# Altium PCB PCB ASCII (3u v0.1-A1).PcbDoc (part 1 of 2)
Units mil, origin at the board's own origin, x right, y up, seen from the top; angles counter-clockwise.
Board outline 2630 x 740 mil, 4 copper layers (Top Layer, Mid-Layer 1, Mid-Layer 2, Bottom Layer), stack 61.6 mil thick; 74 components, 43 nets, 261 pads, 288 vias.
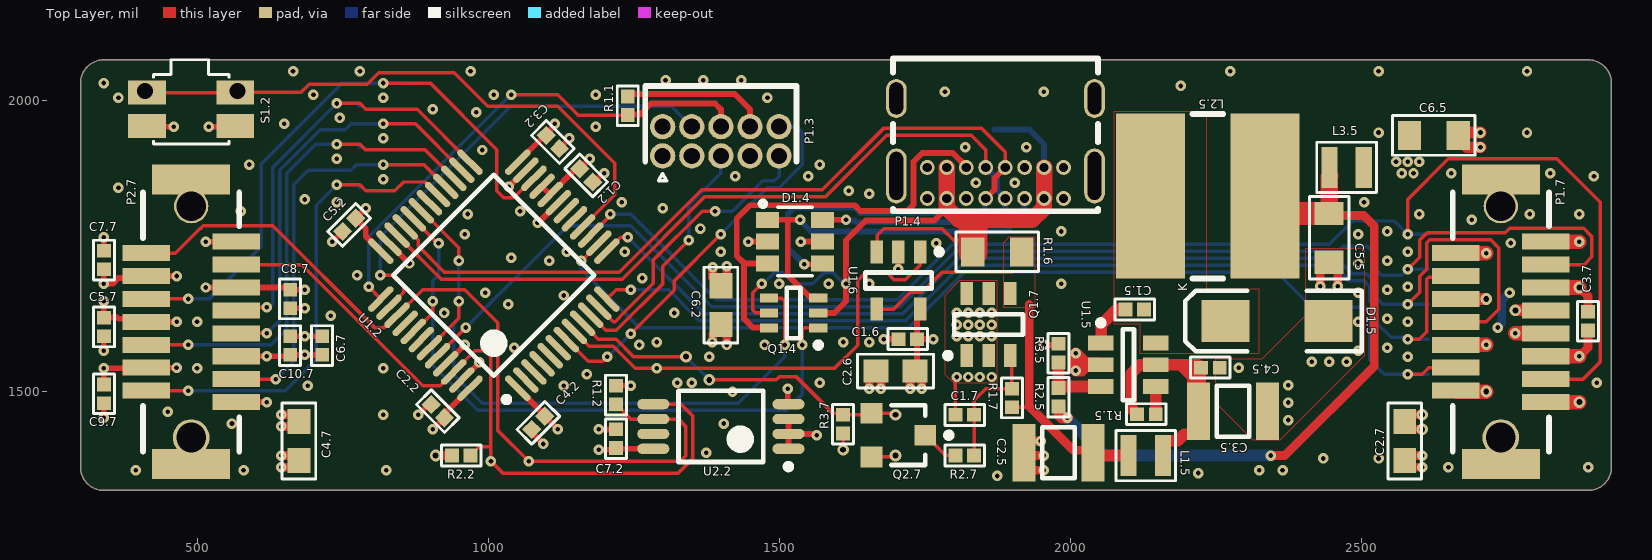
[diagram p0: Top Layer view]
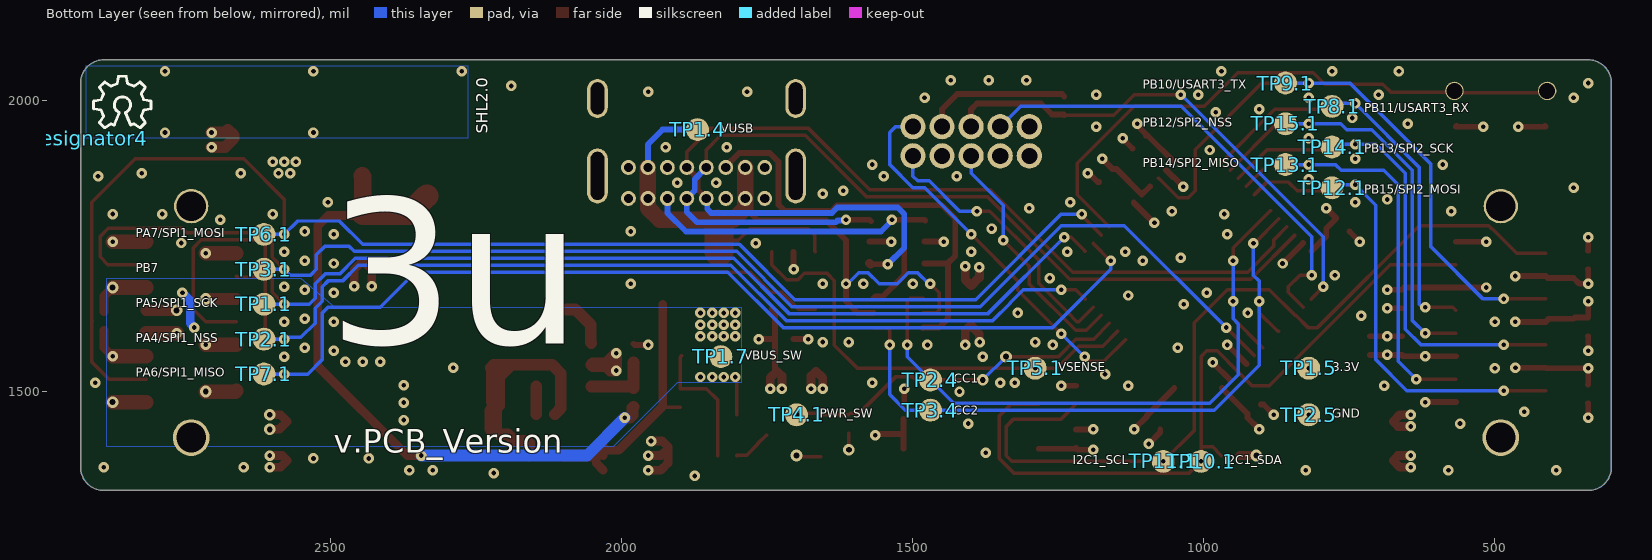
[diagram p1: Bottom Layer view, seen from below]

## Layer stack, top to bottom
Top Solder: solder mask 0.4, Solder Resist, Dk 3.5
Top Layer: signal copper 1.4
Dielectric 1: core 8, FR-4, Dk 4.2
Mid-Layer 1: signal copper 1.4
Dielectric2: prepreg 40, FR-4, Dk 4.2
Mid-Layer 2: signal copper 1.4
Dielectric3: core 8, FR-4, Dk 4.2
Bottom Layer: signal copper 1.4
Bottom Solder: solder mask 0.4, Solder Resist, Dk 3.5

## Board outline
340,1330 cw(c340,1370) 300,1370 300,2030 cw(c340,2030) 340,2070 2890,2070 cw(c2890,2030) 2930,2030 2930,1370 cw(c2890,1370) 2890,1330

## Design rules (kind name [scope] priority, off if disabled: settings)
AssemblyTestPointUsage [All] p0 off: scope1count=1 scope1_0_kind=Board scope1_0_value=Board scope2count=1 scope2_0_kind=Board scope2_0_value=Board commentlength=54 // Protel DXP Scope 1 Expression Was: NetPinCount > 1
AssemblyTestPointUsage [NetPinCount > 1] p1: allowmultiple=TRUE
AssemblyTestpoint [All] p0: scope1count=1 scope1_0_kind=Board scope1_0_value=Board scope2count=1 scope2_0_kind=Board scope2_0_value=Board commentlength=0
AssemblyTestpoint "AssemblyTestpoint Pad" [All] p0 off: scope1count=1 scope1_0_kind=Board scope1_0_value=Board scope2count=1 scope2_0_kind=Board scope2_0_value=Board commentlength=108 // Protel DXP Scope 1 Expression Was: (IsPad And (OnTopLayer Or OnBottomLayer)) Or (IsPad And OnMultiLayer)
AssemblyTestpoint "AssemblyTestpoint Via Both" [All] p0 off: scope1count=1 scope1_0_kind=Board scope1_0_value=Board scope2count=1 scope2_0_kind=Board scope2_0_value=Board commentlength=123 // Protel DXP Scope 1 Expression Was: (IsVia) and (SolderMaskTentingBottom = 'False') and (SolderMaskTentingTop = 'False')
AssemblyTestpoint "AssemblyTestpoint Via Bottom" [All] p0 off: scope1count=1 scope1_0_kind=Board scope1_0_value=Board scope2count=1 scope2_0_kind=Board scope2_0_value=Board commentlength=122 // Protel DXP Scope 1 Expression Was: (IsVia) and (SolderMaskTentingBottom = 'False') and (SolderMaskTentingTop = 'True')
AssemblyTestpoint "AssemblyTestpoint Via Top" [All] p0 off: scope1count=1 scope1_0_kind=Board scope1_0_value=Board scope2count=1 scope2_0_kind=Board scope2_0_value=Board commentlength=122 // Protel DXP Scope 1 Expression Was: (IsVia) and (SolderMaskTentingTop = 'False') and (SolderMaskTentingBottom = 'True')
AssemblyTestpoint "AssemblyTestpoint Via Top" [(IsVia) and (SolderMaskTentingTop = 'False') and (SolderMaskTentingBottom = 'True')] p1: testpointundercomponent=FALSE minsize=16 maxsize=500 preferedsize=60 minholesize=0 maxholesize=500 preferedholesize=32 testpointgrid=1 usegrid=FALSE gridtolerance=0.01 allowsidetop=TRUE
AssemblyTestpoint "AssemblyTestpoint Via Bottom" [(IsVia) and (SolderMaskTentingBottom = 'False') and (SolderMaskTentingTop = 'True')] p2: testpointundercomponent=FALSE minsize=16 maxsize=500 preferedsize=60 minholesize=0 maxholesize=500 preferedholesize=32 testpointgrid=1 usegrid=FALSE gridtolerance=0.01 allowsidebottom=TRUE
AssemblyTestpoint "AssemblyTestpoint Via Both" [(IsVia) and (SolderMaskTentingBottom = 'False') and (SolderMaskTentingTop = 'False')] p3: testpointundercomponent=FALSE minsize=16 maxsize=500 preferedsize=60 minholesize=0 maxholesize=500 preferedholesize=32 testpointgrid=1 usegrid=FALSE gridtolerance=0.01 allowsidetop=TRUE allowsidebottom=TRUE
AssemblyTestpoint "AssemblyTestpoint Pad" [(IsPad And (OnTopLayer Or OnBottomLayer)) Or (IsPad And OnMultiLayer)] p4: testpointundercomponent=TRUE minsize=20 maxsize=10000 preferedsize=60 minholesize=0 maxholesize=500 preferedholesize=32 testpointgrid=1 usegrid=FALSE gridtolerance=0.01 allowsidetop=TRUE allowsidebottom=TRUE
AssemblyTestpoint [All] p5: testpointundercomponent=FALSE minsize=0 maxsize=5000 preferedsize=60 minholesize=0 maxholesize=5000 preferedholesize=32 testpointgrid=1 usegrid=FALSE gridtolerance=0.01 allowsidetop=TRUE allowsidebottom=TRUE
BoardOutlineClearance PolygonPullback [All] p0: scope1count=1 scope1_0_kind=Board scope1_0_value=Board scope2count=1 scope2_0_kind=Board scope2_0_value=Board commentlength=0 gap=5
BoardOutlineClearance "Silk Exception" [All] p0 off: scope1count=1 scope1_0_kind=Board scope1_0_value=Board scope2count=1 scope2_0_kind=Board scope2_0_value=Board commentlength=90 gap=5 // Protel DXP Scope 1 Expression Was: OnLayer('Top Overlay') or OnLayer('Bottom Overlay')
BoardOutlineClearance "Silk Exception" [OnLayer('Top Overlay') or OnLayer('Bottom Overlay')] p1: gap=5 ignorepadtopadclearanceinfootprint=FALSE except(0: Arc-OutlineEdge Arc-CavityEdge Arc-CutoutEdge Arc-SplitBarrior Arc-SplitContinuation Track-OutlineEdge Track-CavityEdge Track-CutoutEdge Track-SplitBarrior Track-SplitContinuation; 10: Fill-OutlineEdge Fill-CavityEdge Fill-CutoutEdge Fill-SplitBarrior Fill-SplitContinuation Poly-OutlineEdge Poly-CavityEdge Poly-CutoutEdge Poly-SplitBarrior Poly-SplitContinuation)
BoardOutlineClearance PolygonPullback [All] p2: gap=5 ignorepadtopadclearanceinfootprint=FALSE except(0: Arc-OutlineEdge Arc-CavityEdge Arc-CutoutEdge Arc-SplitBarrior Arc-SplitContinuation; 10: Fill-OutlineEdge Fill-CavityEdge Fill-CutoutEdge Fill-SplitBarrior Fill-SplitContinuation Poly-OutlineEdge Poly-CavityEdge Poly-CutoutEdge Poly-SplitBarrior Poly-SplitContinuation)
Clearance Clearance_1 [All] p0: scope1count=1 scope1_0_kind=Board scope1_0_value=Board scope2count=1 scope2_0_kind=Board scope2_0_value=Board commentlength=0 gap=6
Clearance "Fiducial Clearance" [All] p0 off: scope1count=1 scope1_0_kind=Board scope1_0_value=Board scope2count=1 scope2_0_kind=Board scope2_0_value=Board commentlength=211 gap=0 // Protel DXP Scope 1 Expression Was: InComponent('M7.1') or InComponent('M1.1')  or InComponent('M2.1')   or InComponent('M3.1')    or InComponent('M4.1')     or InComponent('M5.1')      or InComponent('M6.1')
Clearance "Other Polygon Clearance" [All] p0 off: scope1count=1 scope1_0_kind=Board scope1_0_value=Board scope2count=1 scope2_0_kind=Board scope2_0_value=Board commentlength=48 gap=8 // Protel DXP Scope 1 Expression Was: InPolygon
Clearance "Outer Layer Polygon Clearance" [All] p0 off: scope1count=1 scope1_0_kind=Board scope1_0_value=Board scope2count=1 scope2_0_kind=Board scope2_0_value=Board commentlength=72 gap=6 // Protel DXP Scope 1 Expression Was: InPolygon and (ontop or OnBottom)
Clearance "Board Edge Clearance" [All] p0 off: scope1count=1 scope1_0_kind=Board scope1_0_value=Board scope2count=1 scope2_0_kind=Board scope2_0_value=Board commentlength=53 gap=15 // Protel DXP Scope 2 Expression Was: IsBoardOutline
Clearance "Board Edge Clearance" [IsElectrical vs IsBoardOutline] p1: gap=15 ignorepadtopadclearanceinfootprint=FALSE
Clearance "Outer Layer Polygon Clearance" [InPolygon and (ontop or OnBottom)] p2: gap=6 ignorepadtopadclearanceinfootprint=FALSE
Clearance "Other Polygon Clearance" [InPolygon] p3: gap=8 ignorepadtopadclearanceinfootprint=FALSE
Clearance Clearance_1 [All] p4: gap=6 ignorepadtopadclearanceinfootprint=FALSE
Clearance "Fiducial Clearance" [InComponent('M7.1') or InComponent('M1.1')  or InComponent('M2.1')   or InComponent('M3.1')    or InComponent('M4.1')     or InComponent('M5.1')      or InComponent('M6.1')] p5: gap=0 ignorepadtopadclearanceinfootprint=FALSE
ComponentClearance ComponentClearance_1 [All] p0 off: scope1count=1 scope1_0_kind=Board scope1_0_value=Board scope2count=1 scope2_0_kind=Board scope2_0_value=Board commentlength=47 gap=10 collisioncheckmode=3 // Protel DXP Scope 2 Expression Was: OnBottom
ComponentClearance [All] p0 off: scope1count=1 scope1_0_kind=Board scope1_0_value=Board scope2count=1 scope2_0_kind=Board scope2_0_value=Board commentlength=44 gap=10 collisioncheckmode=3 // Protel DXP Scope 2 Expression Was: OnTop
ComponentClearance [OnTop vs OnTop] p1: gap=10 collisioncheckmode=3 verticalgap=100000 showdistances=FALSE
ComponentClearance ComponentClearance_1 [OnBottom vs OnBottom] p2: gap=10 collisioncheckmode=3 verticalgap=100000 showdistances=FALSE
DiffPairsRouting [All] p0: scope1count=1 scope1_0_kind=Board scope1_0_value=Board scope2count=1 scope2_0_kind=Board scope2_0_value=Board commentlength=0
DiffPairsRouting [All] p1: maxlimit=30 minlimit=5 mostfreqgap=5 toplayer_minwidth=5 toplayer_maxwidth=100 toplayer_prefwidth=15 midlayer1_minwidth=5 midlayer1_maxwidth=100 midlayer1_prefwidth=15 midlayer2_minwidth=5 midlayer2_maxwidth=100 midlayer2_prefwidth=15 bottomlayer_minwidth=5 bottomlayer_maxwidth=100 bottomlayer_prefwidth=15 maxuncoupledlength=500
FabricationTestPointUsage [All] p0 off: scope1count=1 scope1_0_kind=Board scope1_0_value=Board scope2count=1 scope2_0_kind=Board scope2_0_value=Board commentlength=54 valid=0 allowmultiple=TRUE // Protel DXP Scope 1 Expression Was: NetPinCount > 1
FabricationTestPointUsage [NetPinCount > 1] p1 off: valid=0 allowmultiple=TRUE
FabricationTestpoint [All] p0: scope1count=1 scope1_0_kind=Board scope1_0_value=Board scope2count=1 scope2_0_kind=Board scope2_0_value=Board commentlength=0 side=3 testpointundercomponent=TRUE minsize=12 maxsize=10000 preferedsize=30 minholesize=0 maxholesize=200 preferedholesize=32 testpointgrid=1
FabricationTestpoint [All] p1: side=3 testpointundercomponent=TRUE minsize=12 maxsize=10000 preferedsize=30 minholesize=0 maxholesize=200 preferedholesize=32 testpointgrid=1 allowsidetop=TRUE allowsidebottom=TRUE usegrid=FALSE gridtolerance=0.01
FanoutControl Fanout_Default [All] p0: scope1count=1 scope1_0_kind=Board scope1_0_value=Board scope2count=1 scope2_0_kind=Board scope2_0_value=Board commentlength=30 // Fanout_Default (Default Rule)
FanoutControl Fanout_Small [All] p0 off: scope1count=1 scope1_0_kind=Board scope1_0_value=Board scope2count=1 scope2_0_kind=Board scope2_0_value=Board commentlength=84 // Protel DXP Scope 1 Expression Was: (CompPinCount < 5)   Fanout_Small (Default Rule)
FanoutControl Fanout_SOIC [All] p0 off: scope1count=1 scope1_0_kind=Board scope1_0_value=Board scope2count=1 scope2_0_kind=Board scope2_0_value=Board commentlength=71 // Protel DXP Scope 1 Expression Was: IsSOIC   Fanout_SOIC (Default Rule)
FanoutControl Fanout_LCC [All] p0 off: scope1count=1 scope1_0_kind=Board scope1_0_value=Board scope2count=1 scope2_0_kind=Board scope2_0_value=Board commentlength=69 // Protel DXP Scope 1 Expression Was: IsLCC   Fanout_LCC (Default Rule)
FanoutControl Fanout_BGA [All] p0 off: scope1count=1 scope1_0_kind=Board scope1_0_value=Board scope2count=1 scope2_0_kind=Board scope2_0_value=Board commentlength=69 // Protel DXP Scope 1 Expression Was: IsBGA   Fanout_BGA (Default Rule)
Height [All] p0: scope1count=1 scope1_0_kind=Board scope1_0_value=Board scope2count=1 scope2_0_kind=Board scope2_0_value=Board commentlength=0
HoleSize [All] p0: scope1count=1 scope1_0_kind=Board scope1_0_value=Board scope2count=1 scope2_0_kind=Board scope2_0_value=Board commentlength=0 absolutevalues=TRUE maxlimit=250 minlimit=1 maxpercent=80.000 minpercent=20.000
HoleSize [All] p1: absolutevalues=TRUE maxlimit=250 minlimit=1 maxpercent=80.000 minpercent=20.000
HoleToHoleClearance [All] p0: scope1count=1 scope1_0_kind=Board scope1_0_value=Board scope2count=1 scope2_0_kind=Board scope2_0_value=Board commentlength=0
LayerPairs [All] p0: scope1count=1 scope1_0_kind=Board scope1_0_value=Board scope2count=1 scope2_0_kind=Board scope2_0_value=Board commentlength=0 enforce=TRUE
MinimumSolderMaskSliver [All] p0: scope1count=1 scope1_0_kind=Board scope1_0_value=Board scope2count=1 scope2_0_kind=Board scope2_0_value=Board commentlength=0
MinimumSolderMaskSliver [All] p1: minsoldermaskwidth=0
NetAntennae [All] p0: scope1count=1 scope1_0_kind=Board scope1_0_value=Board scope2count=1 scope2_0_kind=Board scope2_0_value=Board commentlength=0
PasteMaskExpansion [All] p0: scope1count=1 scope1_0_kind=Board scope1_0_value=Board scope2count=1 scope2_0_kind=Board scope2_0_value=Board commentlength=0 expansion=-2
PasteMaskExpansion [All] p1: expansion=-2
PermittedLayers [All] p0: scope1count=1 scope1_0_kind=Board scope1_0_value=Board scope2count=1 scope2_0_kind=Board scope2_0_value=Board commentlength=0 toplayerpermitted=TRUE bottomlayerpermitted=TRUE
PermittedLayers [All] p1: toplayerpermitted=TRUE bottomlayerpermitted=TRUE
PlaneClearance [All] p0: scope1count=1 scope1_0_kind=Board scope1_0_value=Board scope2count=1 scope2_0_kind=Board scope2_0_value=Board commentlength=0 clearance=10
PlaneClearance [All] p1: clearance=10
PlaneConnect [All] p0: scope1count=1 scope1_0_kind=Board scope1_0_value=Board scope2count=1 scope2_0_kind=Board scope2_0_value=Board commentlength=0 planeconnectstyle=Direct reliefexpansion=20 reliefentries=4 reliefconductorwidth=10 reliefairgap=10
PlaneConnect [All] p1: planeconnectstyle=Direct reliefexpansion=20 reliefentries=4 reliefconductorwidth=10 reliefairgap=10
PolygonConnect "Direct Connect" [All] p0 off: scope1count=1 scope1_0_kind=Board scope1_0_value=Board scope2count=1 scope2_0_kind=Board scope2_0_value=Board commentlength=71 connectstyle=Relief reliefconductorwidth=10 reliefentries=4 polygonreliefangle="90 Angle" // Protel DXP Scope 1 Expression Was: InPolygonClass('Direct Connect')
PolygonConnect "Pad Connect" [All] p0 off: scope1count=1 scope1_0_kind=Board scope1_0_value=Board scope2count=1 scope2_0_kind=Board scope2_0_value=Board commentlength=44 connectstyle=Relief reliefconductorwidth=15 reliefentries=4 polygonreliefangle="90 Angle" // Protel DXP Scope 1 Expression Was: IsPad
PolygonConnect "Via Connect" [All] p0 off: scope1count=1 scope1_0_kind=Board scope1_0_value=Board scope2count=1 scope2_0_kind=Board scope2_0_value=Board commentlength=44 connectstyle=Direct reliefconductorwidth=10 reliefentries=4 polygonreliefangle="90 Angle" // Protel DXP Scope 2 Expression Was: IsVia
PolygonConnect "Direct Connect" [InPolygonClass('Direct Connect')] p1: thpad.connectstyle=Relief thpad.reliefconductorwidth=10 thpad.reliefentries=4 thpad.polygonreliefangle="90 Angle" thpad.airgapwidth=10 smdpad.connectstyle=Direct smdpad.reliefconductorwidth=10 smdpad.reliefentries=4 smdpad.polygonreliefangle="90 Angle" smdpad.airgapwidth=10 via.connectstyle=Direct via.reliefconductorwidth=10 via.reliefentries=4 via.polygonreliefangle="90 Angle" via.airgapwidth=10
PolygonConnect "Via Connect" [All vs IsVia] p2: connectstyle=Direct reliefconductorwidth=10 reliefentries=4 polygonreliefangle="90 Angle" airgapwidth=10
PolygonConnect "Pad Connect" [IsPad] p3: thpad.connectstyle=Relief thpad.reliefconductorwidth=15 thpad.reliefentries=4 thpad.polygonreliefangle="90 Angle" thpad.airgapwidth=10 smdpad.connectstyle=Relief smdpad.reliefconductorwidth=10 smdpad.reliefentries=4 smdpad.polygonreliefangle="90 Angle" smdpad.airgapwidth=10 via.connectstyle=Direct via.reliefconductorwidth=10 via.reliefentries=4 via.polygonreliefangle="90 Angle" via.airgapwidth=10
RoutingCorners [All] p0: scope1count=1 scope1_0_kind=Board scope1_0_value=Board scope2count=1 scope2_0_kind=Board scope2_0_value=Board commentlength=0 cornerstyle=45-Degree minsetback=10 maxsetback=200
RoutingCorners [All] p1: cornerstyle=45-Degree minsetback=10 maxsetback=200
RoutingLayers [All] p0: scope1count=1 scope1_0_kind=Board scope1_0_value=Board scope2count=1 scope2_0_kind=Board scope2_0_value=Board commentlength=0 top layer=Automatic mid layer 1=Automatic mid layer 2=Automatic bottom layer=Automatic
RoutingPriority [All] p0: scope1count=1 scope1_0_kind=Board scope1_0_value=Board scope2count=1 scope2_0_kind=Board scope2_0_value=Board commentlength=0
RoutingTopology [All] p0: scope1count=1 scope1_0_kind=Board scope1_0_value=Board scope2count=1 scope2_0_kind=Board scope2_0_value=Board commentlength=0 topology=Shortest
RoutingVias [All] p0: scope1count=1 scope1_0_kind=Board scope1_0_value=Board scope2count=1 scope2_0_kind=Board scope2_0_value=Board commentlength=0 holewidth=8 width=16 viastyle="Through Hole" minholewidth=8 minwidth=16 maxholewidth=28 maxwidth=50
RoutingVias [All] p1: holewidth=8 width=16 viastyle="Through Hole" minholewidth=8 minwidth=16 maxholewidth=28 maxwidth=50
ShortCircuit [All] p0: scope1count=1 scope1_0_kind=Board scope1_0_value=Board scope2count=1 scope2_0_kind=Board scope2_0_value=Board commentlength=0 allowed=FALSE
SilkToBoardRegionClearance [All] p0: scope1count=1 scope1_0_kind=Board scope1_0_value=Board scope2count=1 scope2_0_kind=Board scope2_0_value=Board commentlength=0
SilkToSilkClearance [All] p0: scope1count=1 scope1_0_kind=Board scope1_0_value=Board scope2count=1 scope2_0_kind=Board scope2_0_value=Board commentlength=0
SilkToSilkClearance [All] p1: silktosilkclearance=0
SilkToSolderMaskClearance SilkscreenOverComponentPads [All] p0 off: scope1count=1 scope1_0_kind=Board scope1_0_value=Board scope2count=1 scope2_0_kind=Board scope2_0_value=Board commentlength=44 // Protel DXP Scope 1 Expression Was: IsPad
SilkToSolderMaskClearance SilkscreenOverComponentPads [IsPad] p1 off: minsilkscreentomaskgap=0 clearancetoexposedcopper=TRUE
SolderMaskExpansion [All] p0: scope1count=1 scope1_0_kind=Board scope1_0_value=Board scope2count=1 scope2_0_kind=Board scope2_0_value=Board commentlength=0 expansion=4
SolderMaskExpansion [All] p1: expansion=4
UnRoutedNet [All] p0: scope1count=1 scope1_0_kind=Board scope1_0_value=Board scope2count=1 scope2_0_kind=Board scope2_0_value=Board commentlength=0
UnpouredPolygon [All] p0: scope1count=1 scope1_0_kind=Board scope1_0_value=Board scope2count=1 scope2_0_kind=Board scope2_0_value=Board commentlength=0
Width [All] p0: scope1count=1 scope1_0_kind=Board scope1_0_value=Board scope2count=1 scope2_0_kind=Board scope2_0_value=Board commentlength=0 maxlimit=150 minlimit=5 preferedwidth=5
Width [All] p1: maxlimit=150 minlimit=5 preferedwidth=5
16 further rules are at their usual default settings.

## Classes and differential pairs
component class U_connectors: C1.7 C2.7 C3.7 C4.7 C5.7 C6.7 C7.7 C8.7 C9.7 C10.7 P1.7 P2.7 Q1.7 Q2.7 R1.7 R2.7 R3.7 TP1.7
component class U_USB: D1.4 P1.4 Q1.4 TP1.4 TP2.4 TP3.4
component class "U_power supply": C1.5 C2.5 C3.5 C4.5 C5.5 C6.5 D1.5 L1.5 L2.5 L3.5 R1.5 R2.5 R3.5 TP1.5 TP2.5 U1.5
component class U_microcontroller: C1.2 C2.2 C3.2 C4.2 C5.2 C6.2 C7.2 R1.2 R2.2 S1.2 U1.2 U2.2
component class U_jtag: P1.3
component class "U_current sensor": C1.6 C2.6 R1.6 U1.6
component class 3u: R1.1 TP1.1 TP2.1 TP3.1 TP4.1 TP5.1 TP6.1 TP7.1 TP8.1 TP9.1 TP10.1 TP11.1 TP12.1 TP13.1 TP14.1 TP15.1

## Components (designator, comment, footprint, x,y, rotation, side; value= is the part's Value field where it differs from the comment)
C1.2 "100n" 0402 1157.39,1882.61 r315 top
C1.5 "100n" 0402 2095,1641.06 r0 top
C1.6 "100n" 0402 1736.97,1590 r180 top
C1.7 "100n" 0402 1803.03,1460 r0 top
C2.2 "100n" 0402 925,1455 r135 top
C2.5 "10u" 1210 1980,1395 r270 top
C2.6 "4.7uF" 1608[0603] 1700,1535 r0 top
C2.7 "4.7uF" 1608[0603] 2575,1415 r90 top
C3.2 "100n" 0402 1100,1940 r315 top
C3.5 "10u" 1210 2280,1466.06 r90 top
C3.7 "100n" 0402 2890,1636.97 r270 top
C4.2 "100n" 0402 1097.61,1457.61 r225 top
C4.5 "10nF" 0402 2256.97,1541.06 r180 top
C4.7 "4.7uF" 1608[0603] 675,1415 r270 top
C5.2 "100n" 0402 772.61,1797.61 r225 top
C5.5 "22u" 0805 2445,1764.06 r90 top
C5.7 "100n" 0402 340,1595 r90 top
C6.2 "4.7uF" 1608[0603] 1400,1648.46 r270 top
C6.5 "22u" 0805 2625,1940 r180 top
C6.7 "100n" 0402 715,1563.03 r90 top
C7.2 "100n" 0402 1220,1403.03 r90 top
C7.7 "270p" 0402 340,1741.97 r270 top
C8.7 "270p" 0402 660,1643.03 r90 top
C9.7 "270p" 0402 340,1480 r90 top
C10.7 "270p" 0402 660,1595 r270 top
D1.4 "MMQA" SC-74 1527.24,1757.6 r0 top
D1.5 "D Schottky" DO-214AC 2355,1621.06 r90 top
Designator4 "Comment" OSHWA_SHL2_LOGO 2920,1935 r180 bottom
L1.5 "1u" 0806 2130,1390 r0 top
L2.5 "33u" "Murata 2900" 2197.2,1836.06 r0 top
L3.5 "1u" 0806 2475,1885 r0 top
P1.3 "Header 10" GRPB052MWCN-RC 1300,1905 r0 top
P1.4 "USB4085-GF-A" USB4085-GF-A 1871.73,1831.85 r180 top
P1.7 "Header 15" DF9-15S-1V 2740,1619.68 r90 top
P2.7 "Header 15" DF9-15S-1V 490,1619.68 r90 top
Q1.4 "2N7002DW" SOT65P210X110-6N 1525,1635 r180 top
Q1.7 "DMP3050LVT" SOT95P280X100-6N 1860,1615 r90 top
Q2.7 "2N7002" SOT23 1705,1425 r270 top
R1.1 "470" 0402 1240,2006.97 r270 top
R1.2 "2k" 0402 1220,1478.03 r90 top
R1.5 "100k" 0402 2146.97,1461.06 r180 top
R1.6 "10m" 0805 1875,1740 r180 top
R1.7 "10k" 0402 1900,1505 r270 top
R2.2 "2k" 0402 970,1390 r180 top
R2.5 "9.09k" 0402 1980,1506.06 r270 top
R2.7 "1k" 0402 1803.03,1390 r0 top
R3.5 "9.09k" 0402 1980,1581.97 r270 top
R3.7 "10k" 0402 1610,1428.03 r90 top
S1.2 "MOM_SWITCH" EVQ-P6D/P 490,1985 r0 top
TP1.1 "PA5/SPI1_SCK" "Test Point Target 1mm" 2615,1650 r90 bottom
TP1.4 "VUSB" "Test Point Target 1mm" 1870,1950 r90 bottom
TP1.5 "3.3V" "Test Point Target 1mm" 820,1540 r180 bottom
TP1.7 "VBUS_SW" "Test Point Target 1mm" 1830,1560 r0 bottom
TP2.1 "PA4/SPI1_NSS" "Test Point Target 1mm" 2615,1590 r90 bottom
TP2.4 "CC1" "Test Point Target 1mm" 1470,1520 r90 bottom
TP2.5 "GND" "Test Point Target 1mm" 820,1460 r180 bottom
TP3.1 "PB7" "Test Point Target 1mm" 2615,1710 r90 bottom
TP3.4 "CC2" "Test Point Target 1mm" 1470,1468 r90 bottom
TP4.1 "PWR_SW" "Test Point Target 1mm" 1700,1460 r0 bottom
TP5.1 "VSENSE" "Test Point Target 1mm" 1290,1540 r0 bottom
TP6.1 "PA7/SPI1_MOSI" "Test Point Target 1mm" 2615,1770 r90 bottom
TP7.1 "PA6/SPI1_MISO" "Test Point Target 1mm" 2615,1530 r90 bottom
TP8.1 "PB11/USART3_RX" "Test Point Target 1mm" 780,1990 r90 bottom
TP9.1 "PB10/USART3_TX" "Test Point Target 1mm" 860,2030 r90 bottom
TP10.1 "I2C1_SDA" "Test Point Target 1mm" 1005,1380 r90 bottom
TP11.1 "I2C1_SCL" "Test Point Target 1mm" 1070,1380 r90 bottom
TP12.1 "PB15/SPI2_MOSI" "Test Point Target 1mm" 780,1850 r90 bottom
TP13.1 "PB14/SPI2_MISO" "Test Point Target 1mm" 860,1890 r90 bottom
TP14.1 "PB13/SPI2_SCK" "Test Point Target 1mm" 780,1920 r90 bottom
TP15.1 "PB12/SPI2_NSS" "Test Point Target 1mm" 860,1960 r90 bottom
U1.2 "STM32G431Cxx" TSQFP50P900X900X160-48N 1010,1700 r135 top
U1.5 "" MK06A_N 2100,1546.06 r0 top
U1.6 "" SOT23-5 1705,1690.79 r270 top
U2.2 "CAT24C512" TSOP65P640X120-8N 1400,1440 r180 top

## Footprints (in the part's own frame and the unit in brackets; to place one, negate y for a bottom-side part, rotate by r counter-clockwise, add the part's x,y. Pads: shape width x height; smd on the part's side, far side on the other; paste and mask are expansions set on the pad)
0402 [mm]
  rect 0.6x0.6 smd mask+0: 1(0,0) 2(0.812,0)
  silkscreen extent -0.46,-0.46 1.27,0.46
0805 [mil]
  rect 40x50 smd: 1(-42,0) 2(42,0)
  silkscreen extent -71,-34 71,34
0806 [mm] "Chip Resistor, 2-Leads, Body 2.00x1.60mm,"
  rect 0.7x1.8 smd: 1(-0.75,0) 2(0.75,0)
  silkscreen extent -1.3,-1.1 1.3,1.1
1210 [mm]
  rect 2.5x1 smd: 1(0,-1.5) 2(0,1.5)
  silkscreen extent -1.12,-0.71 1.12,0.71
1608[0603] [mm]
  rect 1.1x1 smd: 1(-0.85,0) 2(0.85,0)
  silkscreen extent -1.65,-0.74 1.65,0.74
DF9-15S-1V [mm] "HIROSE CONN RECEPT 15POS 1MM SMD TIN"
  rect 1.3x3.4 smd: 0(-6.207,0) 0_1(6.207,0)
  round 1.6 hole 1.3: 0_2(-5.05,0)
  round 1.5 hole 1.3: 0_3(5.05,0)
  rect 0.7x2.08 smd: 1(3.5,-1.96) 2(3,1.96) 3(2.5,-1.96) 4(2,1.96) 5(1.5,-1.96) 6(1,1.96) 7(0.5,-1.96) 8(0,1.96) 9(-0.5,-1.96) 10(-1,1.96) 11(-1.5,-1.96) 12(-2,1.96) 13(-2.5,-1.96) 14(-3,1.96) 15(-3.5,-1.96)
  silkscreen extent -5.65,-2.1 5.65,2.1
DO-214AC [mm]
  rect 1.85x2.1 smd: A(0.003,-2.258) K(0.003,2.241)
  silkscreen extent -1.32,-3.71 1.33,3.99
EVQ-P6D/P [mm] "SWITCH TACTILE SPST-NO"
  rect 1.65x1.05 smd: 1(-1.925,0.725) 1_1(1.925,0.725) 2(-1.925,-0.725) 2_1(1.925,-0.725)
  round 0.8 hole 0.7: 1_2(2.025,0.8) 1_3(-2.025,0.8)
  silkscreen extent -1.65,-1.52 1.65,2.16
GRPB052MWCN-RC [mm] "UNSHROUDED HEADER, 0.050 10 POS RA"
  round 1.1 hole 0.7: 1(0,0) 2(0,1.27) 3(1.27,0) 4(1.27,1.27) 5(2.54,0) 6(2.54,1.27) 7(3.81,0) 8(3.81,1.27) 9(5.08,0) 10(5.08,1.27)
  silkscreen extent -0.76,-1.08 5.84,3.05
MK06A_N [mm] "SOT23, 6-Leads, Body 3.0x1.7mm, Pitch 0.95mm, Lead Span 2.9mm, IPC Medium Density"
  rect 1.1x0.65 smd: 1(-1.2,0.95) 2(-1.2,0) 3(-1.2,-0.95) 4(1.2,-0.95) 5(1.2,0) 6(1.2,0.95)
  silkscreen extent -1.32,-1.55 0.25,1.95
"Murata 2900" [mm] "Murata 2900 Series surface mount shielded toroidal inductor"
  rect 3x7.2 smd: 1(-1.5,0) 2(3.5,0)
  silkscreen extent 0.33,-3.61 1.68,3.58
OSHWA_SHL2_LOGO [mil]
  silkscreen extent 12,18 111,107
SC-74 [mm]
  rect 1x0.7 smd: 1(-1.2,0.95) 2(-1.2,0) 3(-1.2,-0.95) 4(1.2,-0.95) 5(1.2,0) 6(1.2,0.95)
  silkscreen extent -1.52,-1.5 0.75,1.78
SOT23 [mm] "SOT-23; 3 Leads; Body 3.1 x 2.5 mm, inc. leads (LxW max), Alternate Lead Configuration"
  rect 0.9x0.95 smd: 1(0,1.175) 2(0.95,-1.175) 3(-0.95,-1.175)
  silkscreen extent -1.3,-0.3 1.3,2.33
SOT23-5 [mm] "SOT23, 5-Leads, Body 2.9x3.0mm (max), Pitch 0.95mm, IPC Medium Density"
  rect 1x0.55 smd: 1(-1.25,0.95) 2(-1.25,0) 3(-1.25,-0.95) 4(1.25,-0.95) 5(1.25,0.95)
  silkscreen extent -1.37,-1.45 0.35,1.9
SOT65P210X110-6N [mm] "SOT23, 6-Leads, Body 2.00x2.10mm, Pitch 0.65mm, IPC Medium Density"
  rect 0.8x0.4 smd: 1(-1.075,0.65) 2(-1.075,0) 3(-1.075,-0.65) 4(1.075,-0.65) 5(1.075,0) 6(1.075,0.65)
  silkscreen extent -1.2,-1.1 0.3,1.52
SOT95P280X100-6N [mm] "SOT23, 6-Leads, Body 2.90x2.80mm, Pitch 0.95mm, IPC Medium Density"
  rect 1x0.55 smd: 1(-1.35,0.95) 2(-1.35,0) 3(-1.35,-0.95) 4(1.35,-0.95) 5(1.35,0) 6(1.35,0.95)
  silkscreen extent -1.47,-1.5 0.45,1.9
"Test Point Target 1mm" [mm] "1mm target pad for flying probe"
  round 1 smd: 1(0,0)
TSOP65P640X120-8N [mm] "TSOP, 8-Leads, Body 3.00x4.40mm, Pitch 0.65mm, IPC Medium Density"
  oval 1.4x0.45 smd: 1(-2.95,0.975) 2(-2.95,0.325) 3(-2.95,-0.325) 4(-2.95,-0.975) 5(2.95,-0.975) 6(2.95,-0.325) 7(2.95,0.325) 8(2.95,0.975)
  silkscreen extent -3.08,-1.55 1.85,1.87
TSQFP50P900X900X160-48N [mm] "TSQFP, 48-Leads, Body 7.00x7.00mm, Pitch 0.50mm, IPC Medium Density"
  oval 1.45x0.3 smd: 1(-4.225,2.75) 2(-4.225,2.25) 3(-4.225,1.75) 4(-4.225,1.25) 5(-4.225,0.75) 6(-4.225,0.25) 7(-4.225,-0.25) 8(-4.225,-0.75) 9(-4.225,-1.25) 10(-4.225,-1.75) 11(-4.225,-2.25) 12(-4.225,-2.75) 25(4.225,-2.75) 26(4.225,-2.25) 27(4.225,-1.75) 28(4.225,-1.25) 29(4.225,-0.75) 30(4.225,-0.25) 31(4.225,0.25) 32(4.225,0.75) 33(4.225,1.25) 34(4.225,1.75) 35(4.225,2.25) 36(4.225,2.75)
  oval 0.3x1.45 smd: 13(-2.75,-4.225) 14(-2.25,-4.225) 15(-1.75,-4.225) 16(-1.25,-4.225) 17(-0.75,-4.225) 18(-0.25,-4.225) 19(0.25,-4.225) 20(0.75,-4.225) 21(1.25,-4.225) 22(1.75,-4.225) 23(2.25,-4.225) 24(2.75,-4.225) 37(2.75,4.225) 38(2.25,4.225) 39(1.75,4.225) 40(1.25,4.225) 41(0.75,4.225) 42(0.25,4.225) 43(-0.25,4.225) 44(-0.75,4.225) 45(-1.25,4.225) 46(-1.75,4.225) 47(-2.25,4.225) 48(-2.75,4.225)
  silkscreen extent -4.35,-3.1 3.1,3.57
USB4085-GF-A [mm] "USB TYPE C, 2.0, REC, TH , G/F"
  oval 0.9x1.7 hole 0.6 slot 1.4 at 90 deg: 1(4.325,-4.36) 1_1(-4.325,-4.36)
  oval 0.9x2.4 hole 0.6 slot 2.1 at 90 deg: 1_2(4.325,-0.98) 1_3(-4.325,-0.98)
  round 0.65 hole 0.4: A1(-2.975,0) A4(-2.125,0) A5(-1.275,0) A6(-0.425,0) A7(0.425,0) A8(1.275,0) A9(2.125,0) A12(2.975,0) B1(2.975,-1.35) B4(2.125,-1.35) B5(1.275,-1.35) B6(0.425,-1.35) B7(-0.425,-1.35) B8(-1.275,-1.35) B9(-2.125,-1.35) B12(-2.975,-1.35)
  silkscreen extent -4.47,-6.1 4.47,0.56